# Altium PCB 175-00002 rev 4, PCB, Sinistro Clock Gen.PcbDoc (part 4 of 6)
Units mil, origin at the board's own origin, x right, y up, seen from the top; angles counter-clockwise.
Board outline 5905.51 x 4330.71 mil, 10 copper layers (Top Layer (.GTL), MidLayer1 (*.G1), +12V (*.GP1), -12V (*.GP2), A & GND (*.GP3), Chassis E (*.GP4), +28V & VCC (*.GP5), MidLayer2 (*.G2), MidLayer3 (*.G3), Bottom Layer (.GBL)), stack 64.6 mil thick; 505 components, 332 nets, 1954 pads, 918 vias.
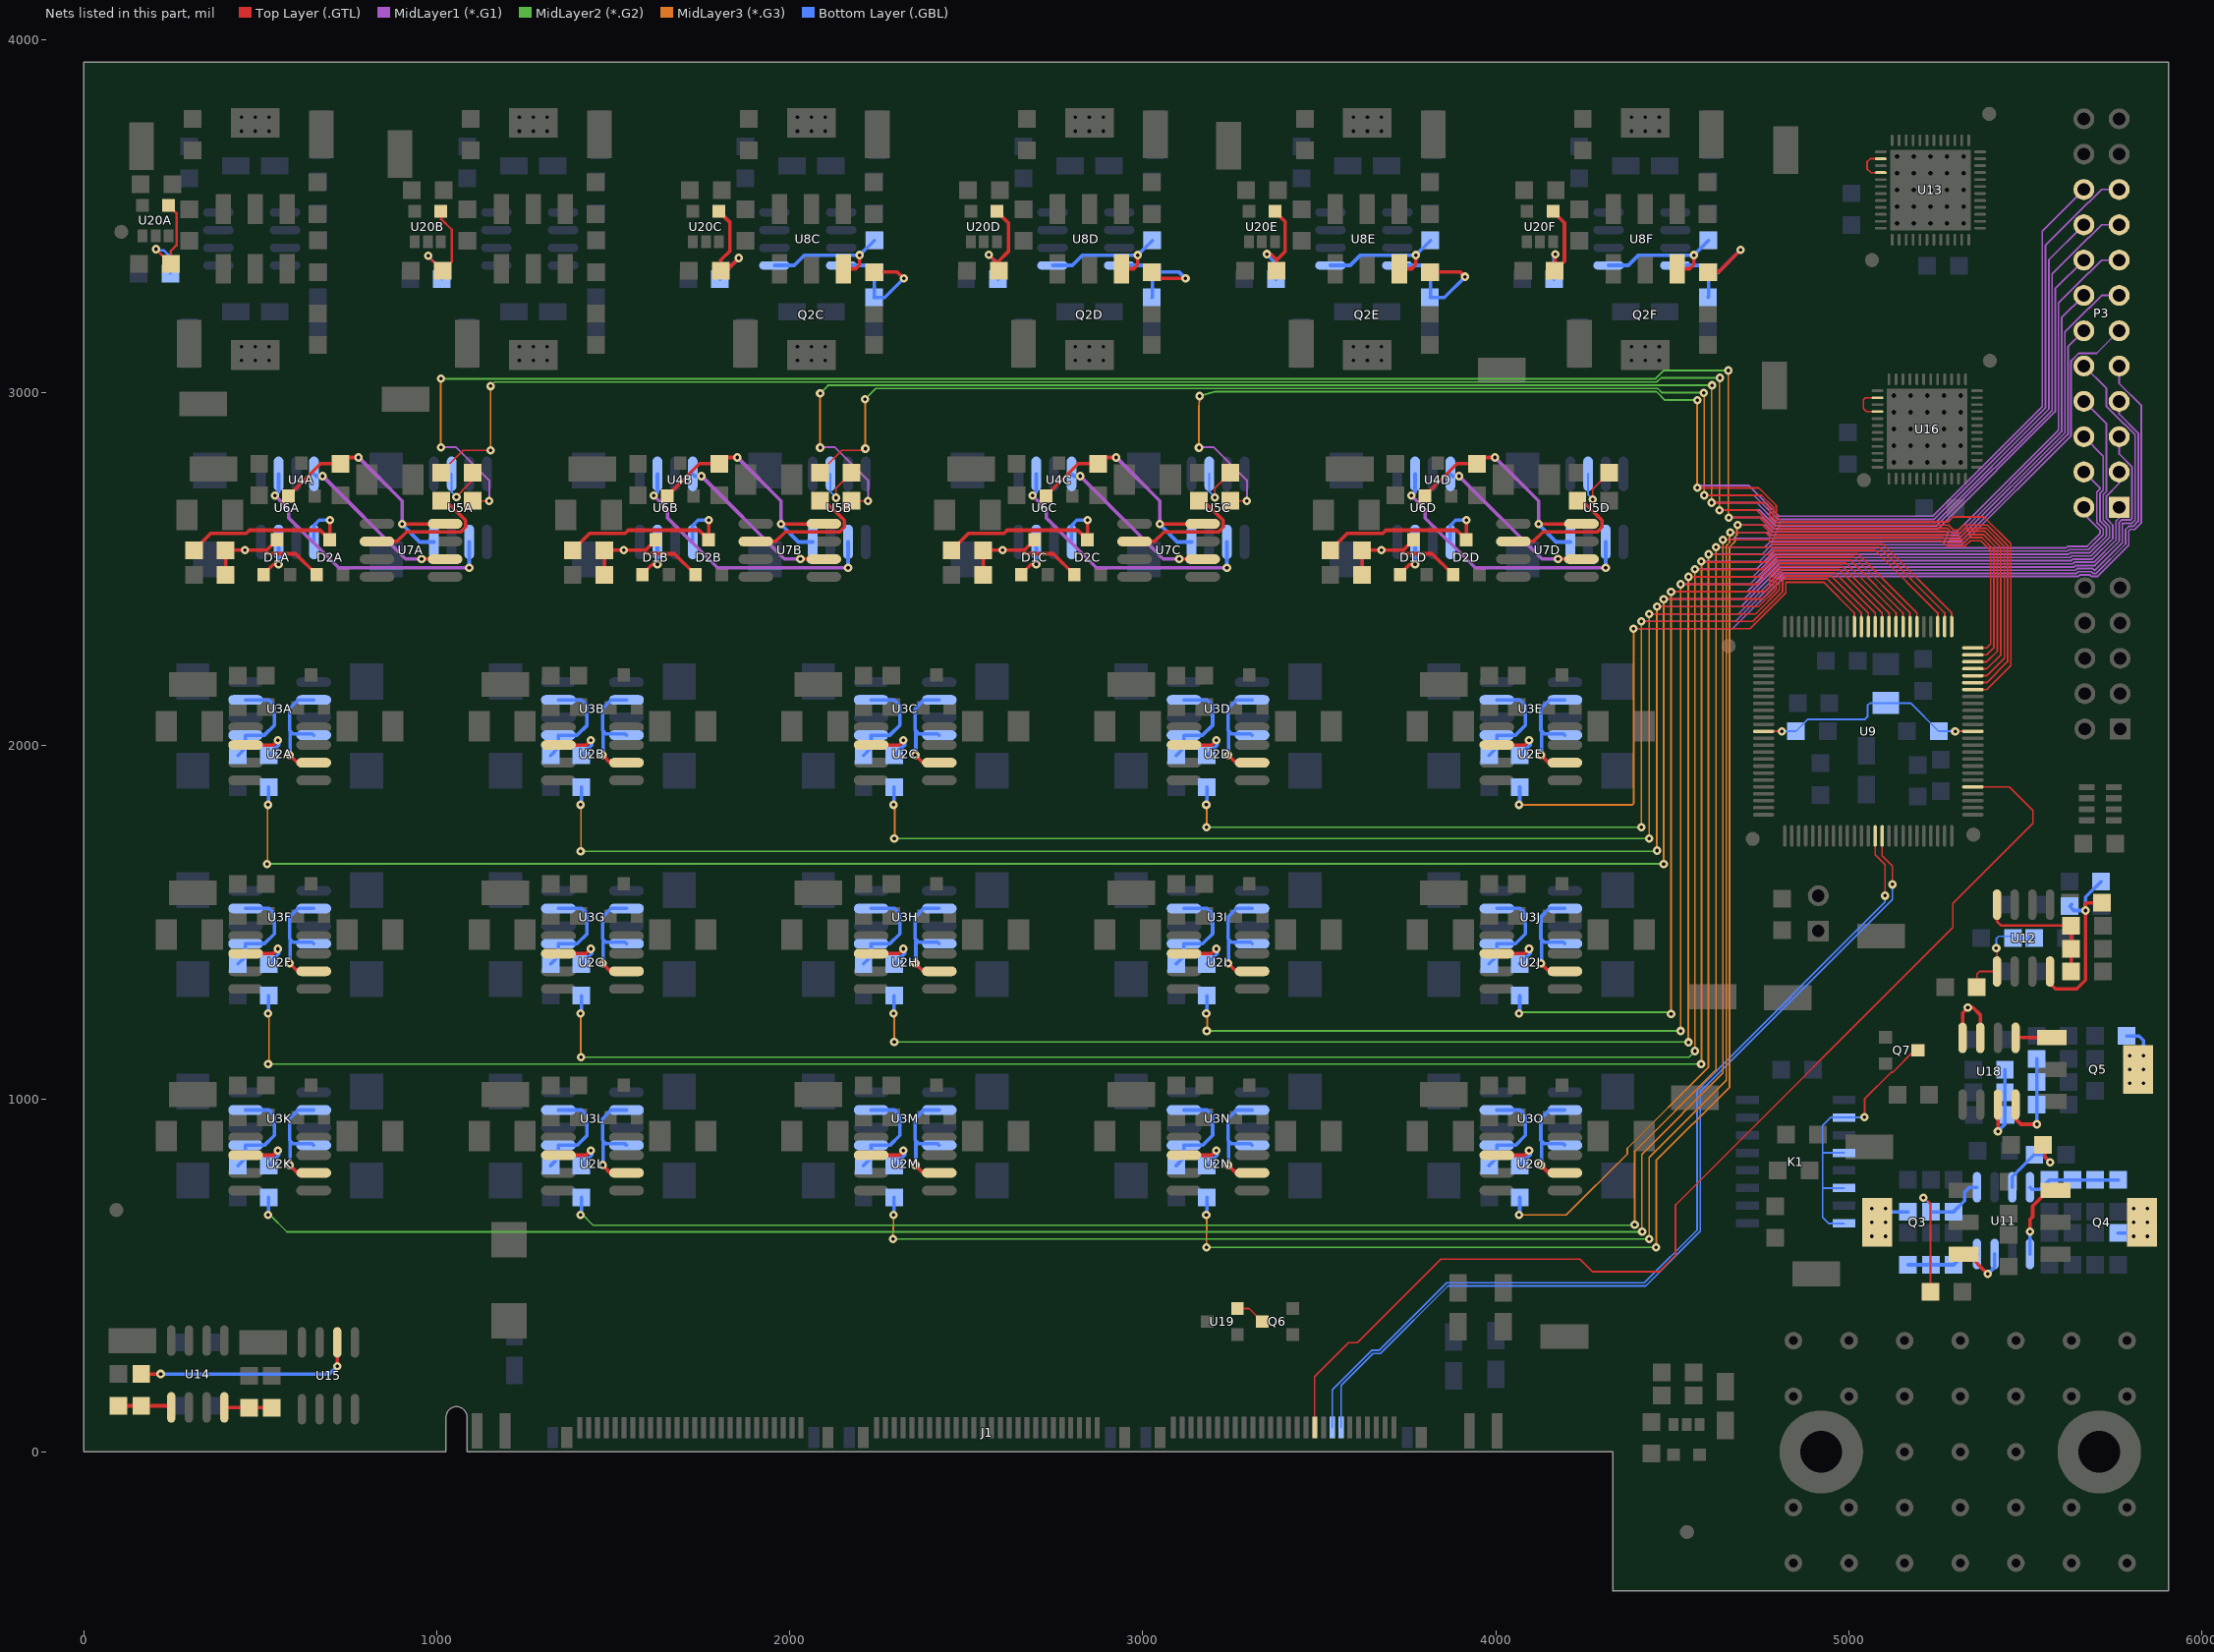
[diagram p12: the nets of this part, all layers, seen from the top]

## Via types
v1: diameter 24, hole 10, Top Layer (.GTL) to Bottom Layer (.GBL), 918 vias

## Nets (pads, with @x,y where several pads share a name; then routed paths per layer and width w, separated by ;. In a path a pad name is that pad's centre, name@x,y a point inside that pad or via, vN(x,y) a via of type N, cw(c..) or ccw(c..) an arc to the next point about the centre after c; other vN are vias at no path point) (continued)
NetC15C_1: C15C.1 R9C.2 R10C.1 U8C.4 | length 373.3
  Top Layer (.GTL) w10: R10C.1@2238.27,3340.83 2305.17,3340.83 v1(2323,3323)
  Bottom Layer (.GBL) w10: U8C.4@2145.75,3360.04 2220.47,3360.04 C15C.1@2239.68,3340.83 2239.68,3270.55 R9C.2@2238.27,3269.13 2269.13,3269.13 v1(2323,3323)
NetC15C_2: C15C.2 Q2C.1 U8C.5 | length 390.6
  Top Layer (.GTL) w10: Q2C.1@2151.65,3350.4 2186.3,3350.39 2198.08,3362.18 v1(2198.08,3389.23)
  Bottom Layer (.GBL) w10: U8C.5@1956.77,3360.04 2012.68,3360.04 2041.87,3389.23 v1(2198.08,3389.23) C15C.2@2239.68,3430.83
NetC15D_1: C15D.1 R9D.2 R10D.1 U8D.4 | length 378.2
  Top Layer (.GTL) w10: R10D.1@3025.67,3340.83 3043.5,3323 v1(3121,3323)
  Bottom Layer (.GBL) w10: U8D.4@2933.15,3360.04 3007.87,3360.04 C15D.1@3027.08,3340.83 ; R9D.2@3025.67,3269.13 3027.08,3270.55 C15D.1@3027.08,3340.83 ; v1(3121,3323) 3103.17,3340.83 C15D.1@3027.08,3340.83
NetC15D_2: C15D.2 Q2D.1 U8D.5 | length 390.6
  Top Layer (.GTL) w10: Q2D.1@2939.06,3350.4 2973.7,3350.39 2985.49,3362.18 v1(2985.49,3389.23)
  Bottom Layer (.GBL) w10: U8D.5@2744.17,3360.04 2800.08,3360.04 2829.27,3389.23 v1(2985.49,3389.23) C15D.2@3027.08,3430.83
NetC15E_1: C15E.1 R9E.2 R10E.1 U8E.4 | length 402.3
  Top Layer (.GTL) w10: R10E.1@3813.07,3340.83 3899.17,3340.83 v1(3912,3328)
  MidLayer1 (*.G1) w10: v1@3912,3327 v1(3912,3328)
  Bottom Layer (.GBL) w10: U8E.4@3720.55,3360.04 3795.27,3360.04 C15E.1@3814.48,3340.83 3814.48,3270.55 R9E.2@3813.07,3269.13 3854.13,3269.13 v1@3912,3327
NetC15E_2: C15E.2 Q2E.1 U8E.5 | length 390.6
  Top Layer (.GTL) w10: Q2E.1@3726.46,3350.4 3761.1,3350.39 3772.89,3362.18 v1(3772.89,3389.23)
  Bottom Layer (.GBL) w10: U8E.5@3531.57,3360.04 3587.48,3360.04 3616.67,3389.23 v1(3772.89,3389.23) C15E.2@3814.48,3430.83
NetC15F_1: C15F.1 R9F.2 R10F.1 U8F.4 | length 410.1
  Top Layer (.GTL) w10: R10F.1@4600.47,3340.83 4629.83,3340.83 v1(4693,3404)
  Bottom Layer (.GBL) w10: U8F.4@4507.95,3360.04 4582.67,3360.04 C15F.1@4601.89,3340.83 ; R9F.2@4600.47,3269.13 4601.89,3270.55 C15F.1@4601.89,3340.83 ; v1(4693,3404) 4629.83,3340.83 C15F.1@4601.89,3340.83
NetC15F_2: C15F.2 Q2F.1 U8F.5 | length 390.6
  Top Layer (.GTL) w10: Q2F.1@4513.86,3350.39 4548.5,3350.39 4560.29,3362.18 v1(4560.29,3389.23)
  Bottom Layer (.GBL) w10: U8F.5@4318.97,3360.04 4374.88,3360.04 4404.07,3389.23 v1(4560.29,3389.23) C15F.2@4601.89,3430.83
NetC26_2: C26.2 C31.2 L5.1 U9.13 U9.63 | length 677.5
  Top Layer (.GTL) w5: U9.13@4758.15,2040.63 v1(4809.41,2040.63) ; v1(5300.41,2040.63) U9.63@5350.67,2040.63
  Bottom Layer (.GBL) w5: v1(4809.41,2040.63) C26.2@4849.41,2040.63 4883.41,2074.63 5045.41,2074.63 5052.41,2081.63 5052.41,2113.63 5059.41,2120.63 L5.1@5104.41,2120.63 5174.41,2120.63 C31.2@5254.41,2040.63 v1(5300.41,2040.63)
NetC28_1: C28.1 R18.1 R19.2 R27.2 U11.4 | length 263.4
  Bottom Layer (.GBL) w10: U11.4@5512.22,749.41 5518.08,743.54 5540.84,743.54 R27.2@5567.22,769.92 R18.1@5632.21,769.92 C28.1@5762.21,769.92
NetC29_1: C29.1 R15.1 R16.2 U11.8 | length 207.6
  Bottom Layer (.GBL) w10: R16.2@5167.21,529.92 C29.1@5232.22,529.92 R15.1@5296.19,529.92 5326.7,560.43 U11.8@5362.22,560.43
NetC30_1: C30.1 R21.1 R22.2 U12.8 | length 392.5
  Top Layer (.GTL) w7: U12.8@5419,1549.49 5419,1502 5431,1490 C30.1@5629,1490
  Top Layer (.GTL) w10: R22.2@5629,1360 R21.1@5629,1425 C30.1@5629,1490
NetC37A_2: C37A.2 U4A.1 U5A.8 U7A.8 | length 729.7
  Top Layer (.GTL) w10: U4A.1@580,2707.05 671.26,2798.31 C37A.2@727.4,2798.31 ; C37A.2@736.4,2807.31 C37A.2@727.4,2798.31 ; v1(779,2816) 745.09,2816 C37A.2@727.4,2798.31 ; v1(902,2628) U7A.8@1023.55,2628
  MidLayer1 (*.G1) w10: v1(779,2816) 902,2693 v1(902,2628)
  Bottom Layer (.GBL) w10: v1(902,2628) 902,2626.7 951.85,2576.85 U5A.8@992.4,2576.85
NetC37B_2: C37B.2 U4B.1 U5B.8 U7B.8 | length 729.7
  Top Layer (.GTL) w10: U4B.1@1652.83,2707.05 1744.09,2798.31 C37B.2@1800.24,2798.31 ; C37B.2@1809.24,2807.31 C37B.2@1800.24,2798.31 ; v1(1851.83,2816) 1817.93,2816 C37B.2@1800.24,2798.31 ; v1(1974.83,2628) U7B.8@2096.39,2628
  MidLayer1 (*.G1) w10: v1(1851.83,2816) 1974.83,2693 v1(1974.83,2628)
  Bottom Layer (.GBL) w10: v1(1974.83,2628) 1974.83,2626.7 2024.69,2576.85 U5B.8@2065.24,2576.85
NetC37C_2: C37C.2 U4C.1 U5C.8 U7C.8 | length 729.7
  Top Layer (.GTL) w10: U4C.1@2725.67,2707.05 2816.93,2798.31 C37C.2@2873.07,2798.31 ; C37C.2@2882.07,2807.31 C37C.2@2873.07,2798.31 ; v1(2924.67,2816) 2890.76,2816 C37C.2@2873.07,2798.31 ; v1(3047.67,2628) U7C.8@3169.22,2628
  MidLayer1 (*.G1) w10: v1(2924.67,2816) 3047.67,2693 v1(3047.67,2628)
  Bottom Layer (.GBL) w10: v1(3047.67,2628) 3047.67,2626.7 3097.52,2576.85 U5C.8@3138.07,2576.85
NetC37D_2: C37D.2 U4D.1 U5D.8 U7D.8 | length 729.7
  Top Layer (.GTL) w10: U4D.1@3798.5,2707.05 3889.76,2798.31 C37D.2@3945.91,2798.31 ; C37D.2@3954.91,2807.31 C37D.2@3945.91,2798.31 ; v1(3997.5,2816) 3963.6,2816 C37D.2@3945.91,2798.31 ; v1(4120.5,2628) U7D.8@4242.05,2628
  MidLayer1 (*.G1) w10: v1(3997.5,2816) 4120.5,2693 v1(4120.5,2628)
  Bottom Layer (.GBL) w10: v1(4120.5,2628) 4120.5,2626.7 4170.35,2576.85 U5D.8@4210.91,2576.85
NetC38_2: C38.2 R28.2 R29.2 U11.1 | length 500.2
  Top Layer (.GTL) w5: v1(5210,720) 5214,720 5231,703 C38.2@5231,453
  Bottom Layer (.GBL) w5: v1(5210,720) 5232.21,697.79 R28.2@5232.21,679.92
  Bottom Layer (.GBL) w10: R28.2@5232.21,679.92 R29.2@5296.19,679.92 5327.72,711.45 5327.72,735.47 5341.65,749.41 U11.1@5362.22,749.41
NetC39_1: C39.1 R37.1 R40.2 U18.4 | length 291.7
  Top Layer (.GTL) w10: U18.4@5471.46,983.35 5471.46,942.83 5486.46,927.84 v1(5531.46,927.84)
  Bottom Layer (.GBL) w10: v1(5531.46,927.84) R37.1@5531.46,1047.84 C39.1@5531.46,1112.84
NetC42_2: C42.2 R47.1 U14.1 | length 151.9
  Top Layer (.GTL) w10: C42.2@98.47,130.51 R47.1@163.46,130.51 243.98,130.51 U14.1@248.47,126.02
NetC45_2: C45.2 R48.2 U11.3 | length 230.5
  Top Layer (.GTL) w10: C45.2@5549,869 5554,864 5554,836 v1(5570,820)
  Bottom Layer (.GBL) w10: U11.3@5462.22,749.41 5462.22,779.26 R48.2@5525,842.04 5547.96,842.04 v1(5570,820)
NetC48_2: C48.2 R24.2 R25.2 U12.1 | length 332.8
  Top Layer (.GTL) w5: C48.2@5362,1316 5362,1353 5369.51,1360.51 U12.1@5419,1360.51 5419,1425 v1(5417,1427)
  Bottom Layer (.GBL) w5: v1(5417,1427) 5417,1453 5424,1460 5459,1460 R24.2@5464,1455 R25.2@5524,1455 R25.2@5502.5,1433.5
NetC49_2: C49.2 R41.2 R42.2 U18.3 | length 258.8
  Top Layer (.GTL) w10: v1(5421.46,907.84) U18.3@5421.46,983.35
  Bottom Layer (.GBL) w10: v1(5421.46,907.84) 5441.46,927.84 R41.2@5441.46,1017.84 R42.2@5441.46,1082.84
NetD1A_1: D1A.1 U6A.7 | length 119.1
  Top Layer (.GTL) w10: D1A.1@510,2484.1 510,2485.91 537.4,2513.31 v1(552.4,2513.31)
  Bottom Layer (.GBL) w10: v1(552.4,2513.31) U6A.7@552.4,2576.85
NetD1A_3: D1A.3 D2A.1 R4A.1 R5A.2 | length 401
  Top Layer (.GTL) w10: R4A.1@402.4,2483.31 R5A.2@402.4,2553.31 518.19,2553.31 ; D1A.3@547.4,2582.52 518.19,2553.31 ; D2A.1@660,2484.1 600.79,2543.31 522.4,2543.31 518.19,2547.52 518.19,2553.31
  other v1: 457.4,2553.31
NetD1B_1: D1B.1 U6B.7 | length 119.1
  Top Layer (.GTL) w10: D1B.1@1582.83,2484.1 1582.83,2485.91 1610.24,2513.31 v1(1625.24,2513.31)
  Bottom Layer (.GBL) w10: v1(1625.24,2513.31) U6B.7@1625.24,2576.85
NetD1B_3: D1B.3 D2B.1 R4B.1 R5B.2 | length 401
  Top Layer (.GTL) w10: R4B.1@1475.24,2483.31 R5B.2@1475.24,2553.31 1591.02,2553.31 ; D1B.3@1620.24,2582.52 1591.02,2553.31 ; D2B.1@1732.83,2484.1 1673.62,2543.31 1595.24,2543.31 1591.02,2547.52 1591.02,2553.31
  other v1: 1530.24,2553.31
NetD1C_1: D1C.1 U6C.7 | length 119.1
  Top Layer (.GTL) w10: D1C.1@2655.67,2484.1 2655.67,2485.91 2683.07,2513.31 v1(2698.07,2513.31)
  Bottom Layer (.GBL) w10: v1(2698.07,2513.31) U6C.7@2698.07,2576.85
NetD1C_3: D1C.3 D2C.1 R4C.1 R5C.2 | length 401
  Top Layer (.GTL) w10: R4C.1@2548.07,2483.31 R5C.2@2548.07,2553.31 2663.86,2553.31 ; D1C.3@2693.07,2582.52 2663.86,2553.31 ; D2C.1@2805.67,2484.1 2746.46,2543.31 2668.07,2543.31 2663.86,2547.52 2663.86,2553.31
  other v1: 2603.07,2553.31
NetD1D_1: D1D.1 U6D.7 | length 119.1
  Top Layer (.GTL) w10: D1D.1@3728.5,2484.1 3728.5,2485.91 3755.91,2513.31 v1(3770.91,2513.31)
  Bottom Layer (.GBL) w10: v1(3770.91,2513.31) U6D.7@3770.91,2576.85
NetD1D_3: D1D.3 D2D.1 R4D.1 R5D.2 | length 401
  Top Layer (.GTL) w10: R4D.1@3620.91,2483.31 R5D.2@3620.91,2553.31 3736.69,2553.31 ; D1D.3@3765.91,2582.52 3736.69,2553.31 ; D2D.1@3878.5,2484.1 3819.29,2543.31 3740.91,2543.31 3736.69,2547.52 3736.69,2553.31
  other v1: 3675.91,2553.31
NetD2A_3: D2A.3 R5A.1 U6A.5 | length 573.5
  Top Layer (.GTL) w10: R5A.1@312.4,2553.31 360.4,2601.31 461.4,2601.31 470.31,2610.22 669.7,2610.22 D2A.3@697.4,2582.52 v1(697.4,2638.31)
  Bottom Layer (.GBL) w10: U6A.5@652.4,2576.85 652.4,2623.31 667.4,2638.31 v1(697.4,2638.31)
NetD2B_3: D2B.3 R5B.1 U6B.5 | length 573.5
  Top Layer (.GTL) w10: R5B.1@1385.24,2553.31 1433.24,2601.31 1534.24,2601.31 1543.15,2610.22 1742.54,2610.22 D2B.3@1770.24,2582.52 v1(1770.24,2638.31)
  Bottom Layer (.GBL) w10: U6B.5@1725.24,2576.85 1725.24,2623.31 1740.24,2638.31 v1(1770.24,2638.31)
NetD2C_3: D2C.3 R5C.1 U6C.5 | length 573.5
  Top Layer (.GTL) w10: R5C.1@2458.07,2553.31 2506.07,2601.31 2607.07,2601.31 2615.98,2610.22 2815.37,2610.22 D2C.3@2843.07,2582.52 v1(2843.07,2638.31)
  Bottom Layer (.GBL) w10: U6C.5@2798.07,2576.85 2798.07,2623.31 2813.07,2638.31 v1(2843.07,2638.31)
NetD2D_3: D2D.3 R5D.1 U6D.5 | length 573.5
  Top Layer (.GTL) w10: R5D.1@3530.91,2553.31 3578.91,2601.31 3679.91,2601.31 3688.82,2610.22 3888.2,2610.22 D2D.3@3915.9,2582.52 v1(3915.91,2638.31)
  Bottom Layer (.GBL) w10: U6D.5@3870.91,2576.85 3870.91,2623.31 3885.91,2638.31 v1(3915.91,2638.31)
NetK1_2: K1.2 K1.4 K1.6 K1.8 Q7.3 | length 837.8
  Top Layer (.GTL) w5: v1(5044,948) 5044,999 5120.38,1075.38 5124.13,1075.38 5185.75,1137 Q7.3@5195.26,1137
  Bottom Layer (.GBL) w5: K1.8@4985.81,647 4942,647 4925,664 4925,747 ; K1.6@4985.81,747 4925,747 ; K1.4@4985.81,847 4925,847 ; v1(5044,948) 5043,947 K1.2@4985.81,947 4948,947 4925,924 4925,847 ; 4925,747 4925,847
NetQ3_1: Q3.1 U11.7 | length 156.5
  Top Layer (.GTL) w10: Q3.1@5324.26,559.37 5336.89,559.37 v1(5392.72,503.54)
  Bottom Layer (.GBL) w10: v1(5392.72,503.54) 5412.22,523.04 U11.7@5412.22,560.43
NetQ3_4: Q3.4 R30.1 | length 67.3
  Bottom Layer (.GBL) w10: Q3.4@5103.79,689.29 5113.16,679.92 R30.1@5167.22,679.92
NetQ4_1: Q4.1 U11.5 | length 222.3
  Top Layer (.GTL) w10: v1(5512.72,623.54) 5512.72,658.85 5520.09,666.22 5520.09,695.92 5564.65,740.47 Q4.1@5585.17,740.47
  Bottom Layer (.GBL) w10: U11.5@5512.22,560.43 5512.22,623.04 v1(5512.72,623.54)
NetQ4_4: Q4.4 R33.1 | length 47.3
  Bottom Layer (.GBL) w10: R33.1@5762.21,619.92 5796.27,619.92 Q4.4@5805.64,610.55
NetQ5_1: Q5.1 U18.5 | length 103.4
  Top Layer (.GTL) w10: U18.5@5471.46,1172.32 5472.52,1173.39 Q5.1@5574.41,1173.39
NetQ5_4: Q5.4 R39.1 | length 95.9
  Bottom Layer (.GBL) w10: R39.1@5786.46,1177.84 5821.45,1177.84 5834.25,1165.04 Q5.4@5834.25,1122.21
NetQ6_3: Q6.3 U19.2 | length 85.3
  Top Layer (.GTL) w5: U19.2@3268,406 3301,406 Q6.3@3338,369
NetR1A_2: R1A.2 U2A.2 | length 159.1
  Top Layer (.GTL) w10: U2A.2@458.98,2001.65 537.13,2001.65 v1@550.59,2015.11
  Bottom Layer (.GBL) w10: R1A.2@523.94,1972.44 553.46,2001.97 553.46,2017.99 v1@550.59,2015.11
  other v1: 550.57,2015.11
NetR1B_2: R1B.2 U2B.2 | length 159.1
  Top Layer (.GTL) w10: U2B.2@1344.8,2001.66 1422.95,2001.65 v1(1436.4,2015.11)
  Bottom Layer (.GBL) w10: R1B.2@1409.76,1972.44 1439.29,2001.97 1439.29,2017.99 v1(1436.4,2015.11)
NetR1C_2: R1C.2 U2C.2 | length 159.1
  Top Layer (.GTL) w10: U2C.2@2230.63,2001.65 2308.78,2001.65 v1(2322.22,2015.11)
  Bottom Layer (.GBL) w10: R1C.2@2295.59,1972.44 2325.12,2001.97 2325.12,2017.99 v1(2322.22,2015.11)
NetR1D_2: R1D.2 U2D.2 | length 159.1
  Top Layer (.GTL) w10: U2D.2@3116.46,2001.65 3194.61,2001.65 v1(3208.05,2015.11)
  Bottom Layer (.GBL) w10: R1D.2@3181.42,1972.44 3210.94,2001.97 3210.94,2017.99 v1(3208.05,2015.11)
NetR1E_2: R1E.2 U2E.2 | length 159.1
  Top Layer (.GTL) w10: U2E.2@4002.28,2001.66 4080.43,2001.65 v1@4093.89,2015.11
  Bottom Layer (.GBL) w10: R1E.2@4067.24,1972.44 4096.77,2001.97 4096.77,2017.99 v1@4093.89,2015.11
  other v1: 4093.88,2015.11
NetR1F_2: R1F.2 U2F.2 | length 159.1
  Top Layer (.GTL) w10: U2F.2@458.98,1411.1 537.13,1411.1 v1@550.59,1424.56
  Bottom Layer (.GBL) w10: R1F.2@523.94,1381.89 553.46,1411.42 553.46,1427.44 v1@550.59,1424.56
  other v1: 550.57,1424.56
NetR1G_2: R1G.2 U2G.2 | length 159.1
  Top Layer (.GTL) w10: U2G.2@1344.8,1411.1 1422.95,1411.1 v1(1436.4,1424.56)
  Bottom Layer (.GBL) w10: R1G.2@1409.76,1381.89 1439.29,1411.42 1439.29,1427.44 v1(1436.4,1424.56)
NetR1H_2: R1H.2 U2H.2 | length 159.1
  Top Layer (.GTL) w10: U2H.2@2230.63,1411.1 2308.78,1411.1 v1(2322.22,1424.56)
  Bottom Layer (.GBL) w10: R1H.2@2295.59,1381.89 2325.12,1411.42 2325.12,1427.44 v1(2322.22,1424.56)
NetR1I_2: R1I.2 U2I.2 | length 159.1
  Top Layer (.GTL) w10: U2I.2@3116.46,1411.1 3194.61,1411.1 v1(3208.05,1424.56)
  Bottom Layer (.GBL) w10: R1I.2@3181.42,1381.89 3210.94,1411.42 3210.94,1427.44 v1(3208.05,1424.56)
NetR1J_2: R1J.2 U2J.2 | length 159.1
  Top Layer (.GTL) w10: U2J.2@4002.28,1411.1 4080.43,1411.1 v1@4093.89,1424.56
  Bottom Layer (.GBL) w10: R1J.2@4067.24,1381.89 4096.77,1411.42 4096.77,1427.44 v1@4093.89,1424.56
  other v1: 4093.88,1424.56
NetR1K_2: R1K.2 U2K.2 | length 159.1
  Top Layer (.GTL) w10: U2K.2@458.97,840.24 537.13,840.24 v1@550.59,853.69
  Bottom Layer (.GBL) w10: R1K.2@523.94,811.02 553.46,840.55 553.46,856.57 v1@550.59,853.69
  other v1: 550.57,853.69
NetR1L_2: R1L.2 U2L.2 | length 159.1
  Top Layer (.GTL) w10: U2L.2@1344.8,840.24 1422.95,840.24 v1(1436.4,853.69)
  Bottom Layer (.GBL) w10: R1L.2@1409.76,811.02 1439.29,840.55 1439.29,856.57 v1(1436.4,853.69)
NetR1M_2: R1M.2 U2M.2 | length 159.1
  Top Layer (.GTL) w10: U2M.2@2230.63,840.24 2308.78,840.24 v1(2322.22,853.69)
  Bottom Layer (.GBL) w10: R1M.2@2295.59,811.02 2325.12,840.55 2325.12,856.57 v1(2322.22,853.69)
NetR1N_2: R1N.2 U2N.2 | length 159.1
  Top Layer (.GTL) w10: U2N.2@3116.46,840.24 3194.61,840.24 v1(3208.05,853.69)
  Bottom Layer (.GBL) w10: R1N.2@3181.42,811.02 3210.94,840.55 3210.94,856.57 v1(3208.05,853.69)
NetR1O_2: R1O.2 U2O.2 | length 159.1
  Top Layer (.GTL) w10: U2O.2@4002.28,840.24 4080.43,840.24 v1@4093.89,853.69
  Bottom Layer (.GBL) w10: R1O.2@4067.24,811.02 4096.77,840.55 4096.77,856.57 v1@4093.89,853.69
  other v1: 4093.88,853.69
NetR2A_1: R2A.1 U3A.5 U3A.7 | length 302.8
  Bottom Layer (.GBL) w10: R2A.1@437.32,1972.44 458.98,1994.09 U3A.5@458.98,2029.61 511.93,2029.61 540.19,2057.87 540.19,2113.94 524.53,2129.61 U3A.7@458.98,2129.61
NetR2B_1: R2B.1 U3B.5 U3B.7 | length 302.8
  Bottom Layer (.GBL) w10: R2B.1@1323.15,1972.44 1344.8,1994.09 U3B.5@1344.8,2029.61 1397.75,2029.61 1426.01,2057.87 1426.01,2113.94 1410.35,2129.61 U3B.7@1344.8,2129.61
NetR2C_1: R2C.1 U3C.5 U3C.7 | length 302.8
  Bottom Layer (.GBL) w10: R2C.1@2208.98,1972.44 2230.63,1994.09 U3C.5@2230.63,2029.61 2283.58,2029.61 2311.84,2057.87 2311.84,2113.94 2296.18,2129.61 U3C.7@2230.63,2129.61
NetR2D_1: R2D.1 U3D.5 U3D.7 | length 302.8
  Bottom Layer (.GBL) w10: R2D.1@3094.8,1972.44 3116.46,1994.09 U3D.5@3116.46,2029.61 3169.41,2029.61 3197.67,2057.87 3197.67,2113.94 3182.01,2129.61 U3D.7@3116.46,2129.61
NetR2E_1: R2E.1 U3E.5 U3E.7 | length 302.8
  Bottom Layer (.GBL) w10: R2E.1@3980.63,1972.44 4002.28,1994.09 U3E.5@4002.28,2029.61 4055.24,2029.61 4083.49,2057.87 4083.49,2113.94 4067.83,2129.61 U3E.7@4002.28,2129.61
NetR2F_1: R2F.1 U3F.5 U3F.7 | length 302.8
  Bottom Layer (.GBL) w10: R2F.1@437.32,1381.89 458.98,1403.54 U3F.5@458.98,1439.05 511.93,1439.05 540.19,1467.31 540.19,1523.39 524.53,1539.05 U3F.7@458.98,1539.05
NetR2G_1: R2G.1 U3G.5 U3G.7 | length 302.8
  Bottom Layer (.GBL) w10: R2G.1@1323.15,1381.89 1344.8,1403.54 U3G.5@1344.8,1439.05 1397.75,1439.05 1426.01,1467.31 1426.01,1523.39 1410.35,1539.05 U3G.7@1344.8,1539.05
NetR2H_1: R2H.1 U3H.5 U3H.7 | length 302.8
  Bottom Layer (.GBL) w10: R2H.1@2208.98,1381.89 2230.63,1403.54 U3H.5@2230.63,1439.05 2283.58,1439.05 2311.84,1467.31 2311.84,1523.39 2296.18,1539.05 U3H.7@2230.63,1539.05
NetR2I_1: R2I.1 U3I.5 U3I.7 | length 302.8
  Bottom Layer (.GBL) w10: R2I.1@3094.8,1381.89 3116.46,1403.54 U3I.5@3116.46,1439.05 3169.41,1439.05 3197.67,1467.31 3197.67,1523.39 3182.01,1539.05 U3I.7@3116.46,1539.05
NetR2J_1: R2J.1 U3J.5 U3J.7 | length 302.8
  Bottom Layer (.GBL) w10: R2J.1@3980.63,1381.89 4002.28,1403.54 U3J.5@4002.28,1439.05 4055.24,1439.05 4083.49,1467.31 4083.49,1523.39 4067.83,1539.05 U3J.7@4002.28,1539.05
NetR2K_1: R2K.1 U3K.5 U3K.7 | length 302.8
  Bottom Layer (.GBL) w10: R2K.1@437.32,811.02 458.98,832.68 U3K.5@458.97,868.19 511.93,868.19 540.19,896.45 540.19,952.53 524.53,968.19 U3K.7@458.97,968.19
NetR2L_1: R2L.1 U3L.5 U3L.7 | length 302.8
  Bottom Layer (.GBL) w10: R2L.1@1323.15,811.02 1344.8,832.68 U3L.5@1344.8,868.19 1397.75,868.19 1426.01,896.45 1426.01,952.53 1410.35,968.19 U3L.7@1344.8,968.19
NetR2M_1: R2M.1 U3M.5 U3M.7 | length 302.8
  Bottom Layer (.GBL) w10: R2M.1@2208.98,811.02 2230.63,832.68 U3M.5@2230.63,868.19 2283.58,868.19 2311.84,896.45 2311.84,952.53 2296.18,968.19 U3M.7@2230.63,968.19
NetR2N_1: R2N.1 U3N.5 U3N.7 | length 302.8
  Bottom Layer (.GBL) w10: R2N.1@3094.8,811.02 3116.46,832.68 U3N.5@3116.46,868.19 3169.41,868.19 3197.67,896.45 3197.67,952.53 3182.01,968.19 U3N.7@3116.46,968.19
NetR2O_1: R2O.1 U3O.5 U3O.7 | length 302.8
  Bottom Layer (.GBL) w10: R2O.1@3980.63,811.02 4002.28,832.68 U3O.5@4002.28,868.19 4055.24,868.19 4083.49,896.45 4083.49,952.53 4067.83,968.19 U3O.7@4002.28,968.19
NetR3A_2: R3A.2 U5A.2 | length 159.9
  Top Layer (.GTL) w5: v1(1056,2704) 1070.9,2718.9 1070.9,2721 1102.4,2752.5 R3A.2@1102.4,2773.31
  Bottom Layer (.GBL) w5: U5A.2@1042.4,2769.76 1042.4,2717.6 v1(1056,2704)
NetR3B_2: R3B.2 U5B.2 | length 163.9
  Top Layer (.GTL) w5: v1(2131,2702) 2131,2729.07 R3B.2@2175.24,2773.31
  Bottom Layer (.GBL) w5: U5B.2@2115.24,2769.76 2115.24,2717.76 v1(2131,2702)
NetR3C_2: R3C.2 U5C.2 | length 161.9
  Top Layer (.GTL) w5: v1(3204,2703) 3204,2729.24 R3C.2@3248.07,2773.31
  Bottom Layer (.GBL) w5: U5C.2@3188.07,2769.76 3188.07,2718.93 v1(3204,2703)
NetR3D_2: R3D.2 U5D.2 | length 173.9
  Top Layer (.GTL) w5: v1(4274,2697) 4274,2726.4 R3D.2@4320.91,2773.31
  Bottom Layer (.GBL) w5: U5D.2@4260.91,2769.76 4260.91,2710.09 v1(4274,2697)
NetR6A_2: R6A.2 U7A.2 | length 379.5
  Top Layer (.GTL) w10: U7A.2@830.95,2578.31 887.4,2578.31 914.62,2605.53 1068.73,2605.53 1082.07,2618.87 1082.07,2637.74 1026.51,2693.31 R6A.2@1012.4,2693.31
NetR6B_2: R6B.2 U7B.2 | length 379.5
  Top Layer (.GTL) w10: U7B.2@1903.78,2578.31 1960.24,2578.31 1987.46,2605.53 2141.56,2605.53 2154.9,2618.87 2154.9,2637.74 2099.34,2693.31 R6B.2@2085.24,2693.31
NetR6C_2: R6C.2 U7C.2 | length 379.5
  Top Layer (.GTL) w10: U7C.2@2976.61,2578.31 3033.07,2578.31 3060.29,2605.53 3214.4,2605.53 3227.74,2618.87 3227.74,2637.74 3172.17,2693.31 R6C.2@3158.07,2693.31
NetR6D_2: R6D.2 U7D.2 | length 379.5
  Top Layer (.GTL) w10: U7D.2@4049.45,2578.31 4105.91,2578.31 4133.13,2605.53 4287.23,2605.53 4300.57,2618.87 4300.57,2637.74 4245.01,2693.31 R6D.2@4230.91,2693.31
NetR17A_1: R17A.1 R23A.2 U20A.4 | length 338.2
  Top Layer (.GTL) w7: v1(205,3406) R17A.1@247,3364 247,3401 263,3417 263,3508 U20A.4@241,3530
  Bottom Layer (.GBL) w7: v1(205,3406) 209,3402 228,3402 246,3384 R23A.2@246,3337
NetR17B_1: R17B.1 R23B.2 U20B.4 | length 332.7
  Top Layer (.GTL) w7: v1(976,3387) 976,3386 R17B.1@1017,3345 1043,3371 1043,3461 1012,3492 U20B.4@1012,3513
  Bottom Layer (.GBL) w7: v1(976,3387) 1015,3348 R23B.2@1015,3321
NetR17C_1: R17C.1 R23C.2 U20C.4 | length 340.8
  Top Layer (.GTL) w10: U20C.4@1799.4,3513 1831,3481.4 1831,3401 1804.4,3374.4 R17C.1@1804.4,3345 1820,3345 v1(1856,3381)
  Bottom Layer (.GBL) w10: R23C.2@1802.4,3321 1802.4,3327.4 v1(1856,3381)
NetR17D_1: R17D.1 R23D.2 U20D.4 | length 302
  Top Layer (.GTL) w10: v1(2564,3390) 2591.8,3362.2 R17D.1@2591.8,3345 ; U20D.4@2586.8,3513 2619,3480.8 2619,3399 2591.8,3371.8
  Bottom Layer (.GBL) w10: v1(2564,3390) 2589.8,3364.2 R23D.2@2589.8,3321
NetR17E_1: R17E.1 R23E.2 U20E.4 | length 306.8
  Top Layer (.GTL) w10: v1(3351,3392) 3362.41,3392 3379.21,3375.21 ; U20E.4@3374.2,3513 3403,3484.2 3403,3399 3379.21,3375.21 ; R17E.1@3379.21,3345 3379.21,3375.21
  Bottom Layer (.GBL) w10: v1(3351,3392) 3377.21,3365.79 R23E.2@3377.21,3321
NetR17F_1: R17F.1 R23F.2 U20F.4 | length 310.7
  Top Layer (.GTL) w10: U20F.4@4161.61,3513 4194,3480.61 4194,3372.39 R17F.1@4166.61,3345 4166.61,3389.61 v1(4168,3391)
  Bottom Layer (.GBL) w10: R23F.2@4164.61,3321 4164.61,3387.61 v1(4168,3391)
NetR26_1: R26.1 R36.1 R38.1 U12.4 | length 579.4
  Top Layer (.GTL) w10: U12.4@5569,1360.51 5569,1327 5585,1311 5645,1311 5670,1336 v1(5670,1533) 5670,1552.59 5672.41,1555 R26.1@5716,1555 R26.1@5712,1551
  Bottom Layer (.GBL) w10: R36.1@5631,1551 R36.1@5625,1545 5637,1533 v1(5670,1533) 5670,1571 R38.1@5714,1615
NetR45_1: R45.1 R46.2 U14.4 | length 135.2
  Top Layer (.GTL) w10: U14.4@398.47,126.02 398.98,125.51 R45.1@533.46,125.51
NetR47_2: R47.2 U15.6 | length 631.5
  Top Layer (.GTL) w10: R47.2@163.46,220.51 218.24,220.51 v1(218.46,220.74) ; v1(718.46,242.74) U15.6@718.46,310
  Bottom Layer (.GBL) w10: v1(218.46,220.74) 696.46,220.74 v1(718.46,242.74)
NetU2A_6: U2A.6 U3A.2 U3A.4 | length 361.8
  Top Layer (.GTL) w10: v1(583.98,1973.7) 606.02,1951.65 U2A.6@651.89,1951.65
  Bottom Layer (.GBL) w10: v1(583.98,1973.7) 585.57,1975.3 585.57,2041.99 583.98,2043.58 ; U3A.4@651.89,2029.61 647.76,2033.74 593.82,2033.74 583.98,2043.58 ; U3A.2@651.89,2129.61 607.99,2129.61 583.98,2105.59 583.98,2043.58
NetU2B_6: U2B.6 U3B.2 U3B.4 | length 361.8
  Top Layer (.GTL) w10: v1(1469.8,1973.7) 1491.85,1951.65 U2B.6@1537.72,1951.66
  Bottom Layer (.GBL) w10: v1(1469.8,1973.7) 1471.4,1975.3 1471.4,2041.99 1469.8,2043.58 ; U3B.4@1537.72,2029.61 1533.58,2033.74 1479.64,2033.74 1469.8,2043.58 ; U3B.2@1537.72,2129.61 1493.82,2129.61 1469.8,2105.59 1469.8,2043.58
NetU2C_6: U2C.6 U3C.2 U3C.4 | length 361.8
  Top Layer (.GTL) w10: v1(2355.63,1973.7) 2377.68,1951.65 U2C.6@2423.54,1951.65
  Bottom Layer (.GBL) w10: v1(2355.63,1973.7) 2357.22,1975.3 2357.22,2041.99 2355.63,2043.58 ; U3C.4@2423.54,2029.61 2419.41,2033.74 2365.47,2033.74 2355.63,2043.58 ; U3C.2@2423.54,2129.61 2379.65,2129.61 2355.63,2105.59 2355.63,2043.58
NetU2D_6: U2D.6 U3D.2 U3D.4 | length 361.8
  Top Layer (.GTL) w10: v1(3241.46,1973.7) 3263.5,1951.65 U2D.6@3309.37,1951.65
  Bottom Layer (.GBL) w10: v1(3241.46,1973.7) 3243.05,1975.3 3243.05,2041.99 3241.46,2043.58 ; U3D.4@3309.37,2029.61 3305.24,2033.74 3251.3,2033.74 3241.46,2043.58 ; U3D.2@3309.37,2129.61 3265.47,2129.61 3241.46,2105.59 3241.46,2043.58
NetU2E_6: U2E.6 U3E.2 U3E.4 | length 361.8
  Top Layer (.GTL) w10: v1(4127.28,1973.7) 4149.33,1951.65 U2E.6@4195.19,1951.66
  Bottom Layer (.GBL) w10: v1(4127.28,1973.7) 4128.88,1975.3 4128.88,2041.99 4127.28,2043.58 ; U3E.4@4195.19,2029.61 4191.06,2033.74 4137.12,2033.74 4127.28,2043.58 ; U3E.2@4195.19,2129.61 4151.3,2129.61 4127.28,2105.59 4127.28,2043.58
NetU2F_6: U2F.6 U3F.2 U3F.4 | length 361.8
  Top Layer (.GTL) w10: v1(583.98,1383.15) 606.02,1361.1 U2F.6@651.89,1361.1
  Bottom Layer (.GBL) w10: v1(583.98,1383.15) 585.57,1384.74 585.57,1451.44 583.98,1453.03 ; U3F.4@651.89,1439.05 647.76,1443.19 593.82,1443.19 583.98,1453.03 ; U3F.2@651.89,1539.05 607.99,1539.05 583.98,1515.04 583.98,1453.03
NetU2G_6: U2G.6 U3G.2 U3G.4 | length 361.8
  Top Layer (.GTL) w10: v1(1469.8,1383.15) 1491.85,1361.1 U2G.6@1537.72,1361.1
  Bottom Layer (.GBL) w10: v1(1469.8,1383.15) 1471.4,1384.74 1471.4,1451.44 1469.8,1453.03 ; U3G.4@1537.72,1439.05 1533.58,1443.19 1479.64,1443.19 1469.8,1453.03 ; U3G.2@1537.72,1539.05 1493.82,1539.05 1469.8,1515.04 1469.8,1453.03
NetU2H_6: U2H.6 U3H.2 U3H.4 | length 361.8
  Top Layer (.GTL) w10: v1(2355.63,1383.15) 2377.68,1361.1 U2H.6@2423.54,1361.1
  Bottom Layer (.GBL) w10: v1(2355.63,1383.15) 2357.22,1384.74 2357.22,1451.44 2355.63,1453.03 ; U3H.4@2423.54,1439.05 2419.41,1443.19 2365.47,1443.19 2355.63,1453.03 ; U3H.2@2423.54,1539.05 2379.65,1539.05 2355.63,1515.04 2355.63,1453.03
NetU2I_6: U2I.6 U3I.2 U3I.4 | length 361.8
  Top Layer (.GTL) w10: v1(3241.46,1383.15) 3263.5,1361.1 U2I.6@3309.37,1361.1
  Bottom Layer (.GBL) w10: v1(3241.46,1383.15) 3243.05,1384.74 3243.05,1451.44 3241.46,1453.03 ; U3I.4@3309.37,1439.05 3305.24,1443.19 3251.3,1443.19 3241.46,1453.03 ; U3I.2@3309.37,1539.05 3265.47,1539.05 3241.46,1515.04 3241.46,1453.03
NetU2J_6: U2J.6 U3J.2 U3J.4 | length 361.8
  Top Layer (.GTL) w10: v1(4127.28,1383.15) 4149.33,1361.1 U2J.6@4195.2,1361.1
  Bottom Layer (.GBL) w10: v1(4127.28,1383.15) 4128.88,1384.74 4128.88,1451.44 4127.28,1453.03 ; U3J.4@4195.2,1439.05 4191.06,1443.19 4137.12,1443.19 4127.28,1453.03 ; U3J.2@4195.2,1539.05 4151.3,1539.05 4127.28,1515.04 4127.28,1453.03
NetU2K_6: U2K.6 U3K.2 U3K.4 | length 361.8
  Top Layer (.GTL) w10: v1(583.98,812.28) 606.02,790.24 U2K.6@651.89,790.24
  Bottom Layer (.GBL) w10: v1(583.98,812.28) 585.57,813.88 585.57,880.57 583.98,882.16 ; U3K.4@651.89,868.19 647.76,872.32 593.82,872.32 583.98,882.16 ; U3K.2@651.89,968.19 607.99,968.19 583.98,944.17 583.98,882.16
NetU2L_6: U2L.6 U3L.2 U3L.4 | length 361.8
  Top Layer (.GTL) w10: v1(1469.8,812.28) 1491.85,790.24 U2L.6@1537.72,790.24
  Bottom Layer (.GBL) w10: v1(1469.8,812.28) 1471.4,813.88 1471.4,880.57 1469.8,882.16 ; U3L.4@1537.72,868.19 1533.58,872.32 1479.64,872.32 1469.8,882.16 ; U3L.2@1537.72,968.19 1493.82,968.19 1469.8,944.17 1469.8,882.16
NetU2M_6: U2M.6 U3M.2 U3M.4 | length 361.8
  Top Layer (.GTL) w10: v1(2355.63,812.28) 2377.68,790.24 U2M.6@2423.54,790.24
  Bottom Layer (.GBL) w10: v1(2355.63,812.28) 2357.22,813.88 2357.22,880.57 2355.63,882.16 ; U3M.4@2423.54,868.19 2419.41,872.32 2365.47,872.32 2355.63,882.16 ; U3M.2@2423.54,968.19 2379.65,968.19 2355.63,944.17 2355.63,882.16
NetU2N_6: U2N.6 U3N.2 U3N.4 | length 361.8
  Top Layer (.GTL) w10: v1(3241.46,812.28) 3263.5,790.24 U2N.6@3309.37,790.24
  Bottom Layer (.GBL) w10: v1(3241.46,812.28) 3243.05,813.88 3243.05,880.57 3241.46,882.16 ; U3N.4@3309.37,868.19 3305.24,872.32 3251.3,872.32 3241.46,882.16 ; U3N.2@3309.37,968.19 3265.47,968.19 3241.46,944.17 3241.46,882.16
NetU2O_6: U2O.6 U3O.2 U3O.4 | length 361.8
  Top Layer (.GTL) w10: v1(4127.28,812.28) 4149.33,790.24 U2O.6@4195.2,790.24
  Bottom Layer (.GBL) w10: v1(4127.28,812.28) 4128.88,813.88 4128.88,880.57 4127.28,882.16 ; U3O.4@4195.2,868.19 4191.06,872.32 4137.12,872.32 4127.28,882.16 ; U3O.2@4195.2,968.19 4151.3,968.19 4127.28,944.17 4127.28,882.16
NetU5A_6: U5A.6 U6A.2 | length 788.5
  MidLayer1 (*.G1) w10: v1(542.4,2708.31) 581.4,2669.31 581.4,2644.61 722.7,2503.31 v1(1092.4,2503.31)
  Bottom Layer (.GBL) w10: v1(542.4,2708.31) 552.4,2718.31 U6A.2@552.4,2769.76 ; v1(1092.4,2503.31) U5A.6@1092.4,2576.85
NetU5B_6: U5B.6 U6B.2 | length 788.5
  MidLayer1 (*.G1) w10: v1(1615.24,2708.31) 1654.24,2669.31 1654.24,2644.61 1795.54,2503.31 v1(2165.24,2503.31)
  Bottom Layer (.GBL) w10: v1(1615.24,2708.31) 1625.24,2718.31 U6B.2@1625.24,2769.76 ; v1(2165.24,2503.31) U5B.6@2165.24,2576.85
NetU5C_6: U5C.6 U6C.2 | length 788.5
  MidLayer1 (*.G1) w10: v1(2688.07,2708.31) 2727.07,2669.31 2727.07,2644.61 2868.37,2503.31 v1(3238.07,2503.31)
  Bottom Layer (.GBL) w10: v1(2688.07,2708.31) 2698.07,2718.31 U6C.2@2698.07,2769.76 ; v1(3238.07,2503.31) U5C.6@3238.07,2576.85
NetU5D_6: U5D.6 U6D.2 | length 788.5
  MidLayer1 (*.G1) w10: v1(3760.91,2708.31) 3799.91,2669.31 3799.91,2644.61 3941.21,2503.31 v1(4310.91,2503.31)
  Bottom Layer (.GBL) w10: v1(3760.91,2708.31) 3770.91,2718.31 U6D.2@3770.91,2769.76 ; v1(4310.91,2503.31) U5D.6@4310.91,2576.85
NetU6A_4: U6A.4 U7A.6 | length 471.5
  Top Layer (.GTL) w10: v1(957.4,2528.31) U7A.6@1023.86,2528.31
  MidLayer1 (*.G1) w10: v1(677.4,2763.31) 912.4,2528.31 v1(957.4,2528.31)
  Bottom Layer (.GBL) w10: U6A.4@652.4,2769.76 658.86,2763.31 v1(677.4,2763.31)
NetU6B_4: U6B.4 U7B.6 | length 471.5
  Top Layer (.GTL) w10: v1(2030.24,2528.31) U7B.6@2096.69,2528.31
  MidLayer1 (*.G1) w10: v1(1750.24,2763.31) 1985.24,2528.31 v1(2030.24,2528.31)
  Bottom Layer (.GBL) w10: U6B.4@1725.24,2769.76 1731.69,2763.31 v1(1750.24,2763.31)
NetU6C_4: U6C.4 U7C.6 | length 471.5
  Top Layer (.GTL) w10: v1(3103.07,2528.31) U7C.6@3169.53,2528.31
  MidLayer1 (*.G1) w10: v1(2823.07,2763.31) 3058.07,2528.31 v1(3103.07,2528.31)
  Bottom Layer (.GBL) w10: U6C.4@2798.07,2769.76 2804.53,2763.31 v1(2823.07,2763.31)
NetU6D_4: U6D.4 U7D.6 | length 471.5
  Top Layer (.GTL) w10: v1(4175.91,2528.31) U7D.6@4242.36,2528.31
  MidLayer1 (*.G1) w10: v1(3895.91,2763.31) 4130.91,2528.31 v1(4175.91,2528.31)
  Bottom Layer (.GBL) w10: U6D.4@3870.91,2769.76 3877.36,2763.31 v1(3895.91,2763.31)
NetU13_2: U13.2 U13.4 | length 104.9
  Top Layer (.GTL) w5: U13.4@5089.74,3622.7 5062.3,3622.7 5051,3634 5051,3653 5060.07,3662.07 U13.2@5089.74,3662.07
NetU16_2: U16.2 U16.4 | length 111
  Top Layer (.GTL) w5: U16.4@5080.74,2945.96 5049.04,2945.96 5041,2954 5041,2980 5046.33,2985.33 U16.2@5080.74,2985.33
NetU18_7: U18.7 U18.8 | length 200.5
  Top Layer (.GTL) w10: U18.8@5321.46,1172.32 5321.46,1242.84 v1(5336.46,1257.84) 5351.46,1257.84 5371.46,1237.83 U18.7@5371.46,1172.32
P1: J1.19 U9.55 | length 3215.4
  Top Layer (.GTL) w5: J1.19@3486.5,69.15 3486.5,213.67 3582.34,309.5 3607.81,309.5 3844.18,545.87 4238.04,545.87 4273.91,510 4314,510 4462.07,510 4508.5,556.43 4508.5,699.41 5294,1484.91 5294,1545.46 5294,1552.91 5521,1779.91 5521,1816.09 5453.94,1883.15 U9.55@5350.67,1883.15
P2: J1.14 U9.40 | length 2674.4
  Top Layer (.GTL) w5: U9.40@5093.78,1744.37 5093.78,1687.76 5123,1658.54 v1(5123,1607)
  Bottom Layer (.GBL) w5: J1.14@3561.5,69.15 3561.5,188.4 3651.61,278.5 3672.59,278.5 3864.09,470 4424.09,470 4579,624.91 4579,1020 5123,1564 v1(5123,1607)
P3: J1.16 U9.39 | length 2675.6
  Top Layer (.GTL) w5: U9.39@5074.09,1744.37 5074.09,1690.62 5102,1662.72 v1(5102,1575)
  Bottom Layer (.GBL) w5: J1.16@3536.5,69.15 3536.5,176.12 3647.88,287.5 3668.86,287.5 3860.36,479 4420.36,479 4570,628.64 4570,1025 5102,1557 v1(5102,1575)
PH_CLK1: P3.2 R1F.1 U9.81 | length 7675.1
  Top Layer (.GTL) w5: v1(4582,2522) 4580,2520 4763.45,2520 4787.45,2544 5024.2,2544 5192.2,2376 U9.81@5192.2,2336.89
  MidLayer1 (*.G1) w5: v1(4582,2522) 4746.45,2522 4784.45,2560 5614.97,2560 5619.24,2564.27 5674.27,2564.27 5711,2601 5711,2609.84 5665,2655.84 P3.2@5665,2675
  MidLayer2 (*.G2) w5: v1(522,1241.87) v1@528,1241.87 ; v1(523,1098) v1(4581,1098)
  MidLayer3 (*.G3) w5: v1(523,1098) 525,1100 v1@525,1246 ; v1@4582,1099 v1(4582,2522)
  Bottom Layer (.GBL) w10: v1(522,1241.87) 523.94,1243.8 R1F.1@523.94,1291.89
PH_CLK2: P3.4 R1G.1 U9.82 | length 6849.7
  Top Layer (.GTL) w5: v1(4563,2500) 4562,2499 4755.18,2499 4791.18,2535 5013.52,2535 5172.52,2376 U9.82@5172.52,2336.89
  MidLayer1 (*.G1) w5: v1(4563,2500) 4737.18,2500 4788.18,2551 5618.7,2551 5622.97,2555.27 5678,2555.27 5720,2597.27 5720,2613.57 5701.97,2631.6 5701.97,2718.4 5710.97,2727.4 5710.97,2729.03 P3.4@5665,2775
  MidLayer2 (*.G2) w5: v1(1407.83,1241.87) v1@1413.83,1241.87 ; v1(1409,1118) 4546.5,1118 v1(4563.5,1135)
  MidLayer3 (*.G3) w5: v1@1408,1247 1408,1131 v1(1409,1118) ; v1(4563,2500) 4563.5,2499.5 v1(4563.5,1135)
  Bottom Layer (.GBL) w10: v1(1407.83,1241.87) 1409.76,1243.8 R1G.1@1409.76,1291.89
PH_CLK3: P3.6 R1H.1 U9.83 | length 5982.5
  Top Layer (.GTL) w5: v1(4545,2478) 4746.9,2478 4794.9,2526 5002.83,2526 5152.83,2376 U9.83@5152.83,2336.89
  MidLayer1 (*.G1) w5: v1(4545,2478) 4727.9,2478 4791.9,2542 5622.43,2542 5626.7,2546.27 5681.73,2546.27 5729,2593.54 5729,2617.3 5710.97,2635.32 5710.97,2714.68 5719.97,2723.68 5719.97,2820.03 P3.6@5665,2875
  MidLayer2 (*.G2) w5: v1(2293.65,1241.87) v1@2299.65,1241.87 ; v1(2296,1161) 4544,1161 v1(4545,1160)
  MidLayer3 (*.G3) w5: v1(2296,1161) v1@2296,1243 ; v1(4545,1160) v1(4545,2478)
  Bottom Layer (.GBL) w10: v1(2293.65,1241.87) 2295.59,1243.8 R1H.1@2295.59,1291.89
PH_CLK4: P3.8 R1I.1 U9.84 | length 5144.6
  Top Layer (.GTL) w5: v1(4523,2457) 4738.63,2457 4798.63,2517 4992.15,2517 5133.15,2376 U9.84@5133.15,2336.89
  MidLayer1 (*.G1) w5: v1(4523,2457) 4719.63,2457 4795.63,2533 5626.15,2533 5630.43,2537.27 5685.46,2537.27 5738,2589.82 5738,2621.02 5719.97,2639.05 5719.97,2710.95 5728.97,2719.95 5728.97,2911.03 P3.8@5665,2975
  MidLayer2 (*.G2) w5: v1(3179.48,1241.87) v1@3185.48,1241.87 ; v1(3181,1192) v1(4523,1192)
  MidLayer3 (*.G3) w5: v1(3181,1192) 3182,1193 v1@3182,1247 ; v1(4523,1192) v1(4523,2457)
  Bottom Layer (.GBL) w10: v1(3179.48,1241.87) 3181.42,1243.8 R1I.1@3181.42,1291.89
PH_CLK5: P3.3 R1J.1 U9.85 | length 3967.9
  Top Layer (.GTL) w5: v1(4496,2436) 4760.18,2436 4776,2451.82 4776,2481.64 4802.36,2508 4981.46,2508 5113.46,2376 U9.85@5113.46,2336.89
  MidLayer1 (*.G1) w5: v1(4496,2436) 4711.36,2436 4799.36,2524 5629.88,2524 5634.15,2528.27 5689.18,2528.27 5747,2586.09 5747,2624.75 5728.97,2642.78 5728.97,2707.22 5765,2743.25 P3.3@5765,2775
  MidLayer2 (*.G2) w5: v1(4065.31,1241.87) v1@4071.31,1241.87 ; v1@4066,1245 4491,1245 v1(4496,1240)
  MidLayer3 (*.G3) w5: v1(4496,1240) v1(4496,2436)
  Bottom Layer (.GBL) w10: v1(4065.31,1241.87) 4067.24,1243.8 R1J.1@4067.24,1291.89
PH_CLK6: P3.13 R1K.1 U9.76 | length 8367.2
  Top Layer (.GTL) w5: v1(4643,2583) 4771.72,2583 4783.72,2571 5095.63,2571 5290.63,2376 U9.76@5290.63,2336.89
  MidLayer1 (*.G1) w5: v1(4643,2583) 4671,2583 4675,2587 5312.36,2587 5610.97,2885.61 5610.97,3171.92 5678.02,3238.97 5679.92,3238.97 5715.95,3275 P3.13@5765,3275
  MidLayer2 (*.G2) w5: v1(522,671) 528,671 576,623 4413,623 v1(4414,624)
  MidLayer3 (*.G3) w5: v1@4413,623 4413,842.72 4643,1072.72 v1(4643,2583)
  Bottom Layer (.GBL) w10: v1(522,671) 523.94,672.94 R1K.1@523.94,721.02
PH_CLK7: P3.12 R1L.1 U9.77 | length 7273.5
  Top Layer (.GTL) w5: v1(4623,2562) 5084.94,2562 5270.94,2376 U9.77@5270.94,2336.89
  MidLayer1 (*.G1) w5: v1(4623,2562) 4760.99,2562 4776.99,2578 5316.09,2578 5619.97,2881.89 5619.97,3129.97 P3.12@5665,3175
  MidLayer2 (*.G2) w5: v1(1407.83,671) v1@1413.83,671 ; v1@1410,675 1443,642 4392,642 v1(4393,643)
  MidLayer3 (*.G3) w5: v1(4393,643) 4393,851 4623,1081 v1(4623,2562)
  Bottom Layer (.GBL) w10: v1(1407.83,671) 1409.76,672.94 R1L.1@1409.76,721.02
PH_CLK8: P3.14 R1M.1 U9.75 | length 6934.2
  Top Layer (.GTL) w5: v1(4664,2604) 4763.45,2604 4787.45,2580 5262.46,2580 5276.7,2565.76 5329.3,2565.76 5343.54,2580 5373,2580 5401,2552 5401,2287.85 5390,2276.85 U9.75@5350.67,2276.85
  MidLayer1 (*.G1) w5: v1(4664,2604) 4769,2604 4777,2596 5308.63,2596 5601.97,2889.34 5601.97,3211.97 P3.14@5665,3275
  MidLayer2 (*.G2) w5: v1(2292,603) v1(4434,603) ; v1(2293.65,671) v1@2299.65,671
  MidLayer3 (*.G3) w5: v1(2292,603) v1@2295,679 ; v1(4434,603) 4434,834.02 4652.66,1052.67 4652.66,1452.65 4652.48,1452.83 4652.48,2566.31 4661.5,2575.34 v1@4661.5,2604
  Bottom Layer (.GBL) w10: v1(2293.65,671) 2295.59,672.94 R1M.1@2295.59,721.02
PH_CLK9: P3.15 R1N.1 U9.74 | length 6302.9
  Top Layer (.GTL) w5: v1(4684,2625) 4755.18,2625 4791.18,2589 5266.19,2589 5280.43,2574.76 5325.57,2574.76 5339.81,2589 5376.73,2589 5410,2555.73 5410,2277.17 5390,2257.17 U9.74@5350.67,2257.17
  MidLayer1 (*.G1) w5: v1(4684,2625) 4763.18,2625 4783.18,2605 5304.9,2605 5592.97,2893.07 5592.97,3253.92 5678.02,3338.97 5679.92,3338.97 5715.95,3375 P3.15@5765,3375
  MidLayer2 (*.G2) w5: v1(3179.48,671) v1@3185.48,671 ; v1(3180,579) v1(4454,579)
  MidLayer3 (*.G3) w5: v1(3180,579) v1@3181,674 ; v1@4454,575 v1(4454,579) 4454,825.73 4661.66,1033.39 4661.66,1456.38 4661.48,1456.55 4661.48,2562.59 4676.58,2577.69 4676.58,2590.42 4682.5,2596.34 v1@4682.5,2625
  Bottom Layer (.GBL) w10: v1(3179.48,671) 3181.42,672.94 R1N.1@3181.42,721.02
PH_CLK10: P3.9 R1E.1 U9.90 | length 3709.8
  Top Layer (.GTL) w5: v1(4390,2331) 4718.82,2331 4821,2433.18 4821,2463 4928.04,2463 5015.04,2376 U9.90@5015.04,2336.89
  MidLayer1 (*.G1) w5: v1(4390,2331) 4670,2331 4818,2479 5648.52,2479 5652.79,2483.27 5682.64,2483.27 5686.91,2479 5703.55,2479 5792,2567.45 5792,2608.3 5795.68,2611.97 5808.4,2611.97 5828.03,2631.6 5828.03,2962.92 5765,3025.95 P3.9@5765,3075
  MidLayer2 (*.G2) w5: v1(4065.31,1832.42) v1@4071.31,1832.42
  MidLayer3 (*.G3) w5: v1(4065.31,1832.42) 4386.42,1832.42 4390,1836 v1(4390,2331)
  Bottom Layer (.GBL) w10: v1(4065.31,1832.42) 4067.24,1834.35 R1E.1@4067.24,1882.44
PH_CLK11: P3.11 R1O.1 U9.78 | length 4546.9
  Top Layer (.GTL) w5: v1(4602,2542) 4601,2541 4771.72,2541 4783.72,2553 5074.26,2553 5251.26,2376 U9.78@5251.26,2336.89
  MidLayer1 (*.G1) w5: v1(4602,2542) 4753.72,2542 4780.72,2569 5319.81,2569 5628.97,2878.16 5628.97,3089.92 5650.08,3111.03 5701.03,3111.03 P3.11@5765,3175
  MidLayer2 (*.G2) w5: v1(4065.31,671) v1@4071.31,671
  MidLayer3 (*.G3) w5: v1(4065.31,671) 4199.17,671 4372,843.83 4372,859.7 4602,1089.7 v1(4602,2542)
  Bottom Layer (.GBL) w10: v1(4065.31,671) 4067.24,672.94 R1O.1@4067.24,721.02
PH_CLK12: P3.1 R1A.1 U9.86 | length 7167.4
  Top Layer (.GTL) w5: v1(4475,2415) 4751.91,2415 4785,2448.09 4785,2477.91 4806.09,2499 4970.78,2499 5093.78,2376 U9.86@5093.78,2336.89 U9.86@5093.78,2366.26
  MidLayer1 (*.G1) w5: v1(4475,2415) 4703.09,2415 4803.09,2515 5633.61,2515 5637.88,2519.27 5692.91,2519.27 5756,2582.36 5756,2635.94 5765,2644.94 P3.1@5765,2675
  MidLayer2 (*.G2) w5: v1(520,1665) v1(4475,1665) ; v1(522,1832.42) v1@528,1832.42
  MidLayer3 (*.G3) w5: v1(520,1665) 521,1666 v1@521,1833 ; v1(4475,1665) v1(4475,2415)
  Bottom Layer (.GBL) w10: v1(522,1832.42) 523.94,1834.35 R1A.1@523.94,1882.44
PH_CLK13: P3.5 R1B.1 U9.87 | length 6416.4
  Top Layer (.GTL) w5: v1(4456,2394) 4743.64,2394 4794,2444.36 4794,2474.18 4809.82,2490 4960.09,2490 5074.09,2376 U9.87@5074.09,2336.89
  MidLayer1 (*.G1) w5: v1(4456,2394) 4694.82,2394 4806.82,2506 5637.34,2506 5641.61,2510.27 5696.64,2510.27 5765,2578.63 5765,2632.21 5771.76,2638.97 5797.22,2638.97 5801.03,2642.78 5801.03,2789.92 5765,2825.95 P3.5@5765,2875
  MidLayer2 (*.G2) w5: v1(1407.83,1832.42) v1@1413.83,1832.42 ; v1(1408,1701) v1@4458.66,1701
  MidLayer3 (*.G3) w5: v1(1408,1701) 1409,1702 v1@1409,1830 ; v1(4456,1702.75) v1(4456,2394)
  Bottom Layer (.GBL) w10: v1(1407.83,1832.42) 1409.76,1834.35 R1B.1@1409.76,1882.44
PH_CLK14: P3.10 R1C.1 U9.88 | length 5710.7
  Top Layer (.GTL) w5: v1(4434,2373) 4735.37,2373 4803,2440.63 4803,2470.46 4813.54,2481 4949.41,2481 5054.41,2376 U9.88@5054.41,2336.89
  MidLayer1 (*.G1) w5: v1(4434,2373) 4686.54,2373 4810.54,2497 5641.07,2497 5645.34,2501.27 5690.1,2501.27 5694.37,2497 5696.1,2497 5774,2574.9 5774,2628.48 5775.49,2629.97 5800.95,2629.97 5810.03,2639.05 5810.03,2880.92 5779.92,2911.03 5778.02,2911.03 5728.97,2960.08 5728.97,3011.03 P3.10@5665,3075
  MidLayer2 (*.G2) w5: v1(2293.65,1832.42) v1@2299.65,1832.42 ; v1(2296,1737) v1(4434,1737)
  MidLayer3 (*.G3) w5: v1(2296,1737) 2297,1738 v1@2297,1833 ; v1(4434,1737) v1(4434,2373)
  Bottom Layer (.GBL) w10: v1(2293.65,1832.42) 2295.59,1834.35 R1C.1@2295.59,1882.44
PH_CLK15: P3.7 R1D.1 U9.89 | length 4624.9
  Top Layer (.GTL) w5: v1(4412,2352) 4727.1,2352 4812,2436.9 4812,2466.73 4817.27,2472 4938.72,2472 5034.72,2376 U9.89@5034.72,2336.89
  MidLayer1 (*.G1) w5: v1(4412,2352) 4678.27,2352 4814.27,2488 5644.79,2488 5649.07,2492.27 5686.37,2492.27 5690.64,2488 5699.82,2488 5783,2571.18 5783,2612.02 5791.95,2620.97 5804.68,2620.97 5819.03,2635.32 5819.03,2884.65 5765,2938.68 P3.7@5765,2975
  MidLayer2 (*.G2) w5: v1(3179.48,1832.42) v1@3185.48,1832.42 ; v1(3180,1769) v1@4411,1769
  MidLayer3 (*.G3) w5: v1(3180,1769) 3181,1770 v1@3181,1840 ; v1(4412,1769) v1(4412,2352)
  Bottom Layer (.GBL) w10: v1(3179.48,1832.42) 3181.42,1834.35 R1D.1@3181.42,1882.44
PH_CLK16: P3.16 R6A.1 U9.73 | length 7268
  Top Layer (.GTL) w5: R6A.1@1102.4,2693.31 1102.71,2693 v1(1149,2693) ; v1@4660,2648 4662,2646 4746.9,2646 4794.9,2598 5269.91,2598 5284.15,2583.76 5321.85,2583.76 5336.09,2598 5380.46,2598 5420,2558.46 5420,2267.48 5390,2237.48 U9.73@5350.67,2237.48
  Top Layer (.GTL) w10: v1(1012,2845) v1@1012.4,2844.6
  MidLayer1 (*.G1) w5: v1(1012,2845) 1055,2845 1149,2751 v1(1149,2693) ; v1(4659,2646) 4754.9,2646 4786.9,2614 5252.26,2614 5583.97,2945.71 5583.97,3293.97 P3.16@5665,3375
  MidLayer2 (*.G2) w5: v1(1012,3039) 4452,3039 4475.49,3062.49 v1(4658,3062.49)
  MidLayer3 (*.G3) w5: v1(1012,2845) v1(1012,3039) ; v1(4658,3062.49) 4658,2647 v1(4659,2646)
PH_CLK17: P3.17 R3A.1 U9.72 | length 7196.5
  Top Layer (.GTL) w5: R3A.1@1012.4,2773.31 1075.09,2836 v1(1153,2836) ; v1@4633,2669 4635,2667 4738.63,2667 4798.63,2607 5273.64,2607 5287.88,2592.76 5318.12,2592.76 5332.36,2607 5384.18,2607 5430,2561.18 5430,2257.8 5390,2217.8 U9.72@5350.67,2217.8
  MidLayer1 (*.G1) w5: v1(4633,2667) 4746.63,2667 4790.63,2623 5248.53,2623 5574.97,2949.44 5574.97,3335.92 5678.02,3438.97 5679.92,3438.97 5715.95,3475 P3.17@5765,3475
  MidLayer2 (*.G2) w5: v1(1153,3018) 1164.49,3029.49 4455.22,3029.49 4467.22,3041.49 v1(4634,3041.49)
  MidLayer3 (*.G3) w5: v1(1153,2836) v1(1153,3018) ; v1(4633,2667) 4633,3040.49 v1(4634,3041.49)
PH_CLK18: P3.18 R6B.1 U9.71 | length 6314.9
  Top Layer (.GTL) w5: R6B.1@2175.24,2693.31 2175.54,2693 v1(2221.83,2693) ; v1@4611,2690 4613,2688 4760.18,2688 4776,2672.18 4776,2642.36 4802.36,2616 5277.37,2616 5291.61,2601.76 5314.39,2601.76 5328.63,2616 5387.91,2616 5440,2563.91 5440,2248.11 5390,2198.11 U9.71@5350.67,2198.11
  Top Layer (.GTL) w10: v1@2084.83,2845 v1@2085.24,2844.6 ; v1@2085.24,2843.24 v1(2086,2844)
  MidLayer1 (*.G1) w5: v1@2084.83,2845 2127.83,2845 2221.83,2751 v1(2221.83,2693) ; v1(4611,2688) 4738.36,2688 4794.36,2632 5244.8,2632 5565.97,2953.17 5565.97,3375.97 P3.18@5665,3475
  MidLayer2 (*.G2) w5: v1(2086,2998) 2108.49,3020.49 v1(4612,3020.49)
  MidLayer3 (*.G3) w5: v1(2086,2844) v1(2086,2998) ; v1(4611,2688) 4611,3019.49 v1(4612,3020.49)
PH_CLK19: P3.19 R3B.1 U9.70 | length 6241
  Top Layer (.GTL) w5: R3B.1@2085.24,2773.31 2147.93,2836 v1@2214,2836 ; v1@4590,2710 4591,2709 4751.91,2709 4785,2675.91 4785,2646.09 4806.09,2625 5281.1,2625 5295.34,2610.76 5310.66,2610.76 5324.9,2625 5391.64,2625 5449,2567.64 5449,2237.43 5390,2178.43 U9.70@5350.67,2178.43
  MidLayer1 (*.G1) w5: v1(4590,2709) 4730.09,2709 4798.09,2641 5241.07,2641 5556,2955.93 5556,3416.95 5678.02,3538.97 5679.92,3538.97 5715.95,3575 P3.19@5765,3575
  MidLayer2 (*.G2) w5: v1(2213,2981) 2243.49,3011.49 4458.46,3011.49 4470.46,2999.49 v1(4589,2999.49) v1@4590,2999.49
  MidLayer3 (*.G3) w5: v1(2213,2981) 2214,2980 v1(2214,2841) ; v1(4589,2999.49) 4590,2998.49 v1(4590,2709)
PH_CLK20: P3.20 R6C.1 U9.69 | length 5373.9
  Top Layer (.GTL) w5: R6C.1@3248.07,2693.31 3248.38,2693 v1(3294.67,2693) ; v1(4570,2730) 4743.64,2730 4794,2679.64 4794,2649.82 4809.82,2634 5281.58,2634 5295.34,2647.76 5381.61,2647.76 5458,2571.37 5458,2226.74 5390,2158.74 U9.69@5350.67,2158.74
  Top Layer (.GTL) w10: v1@3157.67,2845 v1@3158.07,2844.6 ; v1@3158.07,2843.24 v1(3158.83,2844)
  MidLayer1 (*.G1) w5: v1@3157.67,2845 3200.67,2845 3294.67,2751 v1(3294.67,2693) ; v1(4570,2730) 4576.91,2736.91 4714.91,2736.91 4801.82,2650 5237.35,2650 5547,2959.65 5547,3457 P3.20@5665,3575
  MidLayer2 (*.G2) w5: v1(3160.55,2989.89) 3204.49,3002.49 4454.73,3002.49 4478.73,2978.49 v1(4570,2978.49)
  MidLayer3 (*.G3) w5: v1@3159,2839 3159,2955 v1(3160.55,2989.89) ; v1(4570,2730) v1(4570,2978.49)